# Altium PCB MC1_LCD.PcbDoc
Units mm, origin at the board's own origin, x right, y up, seen from the top; angles counter-clockwise.
Board outline 45.1 x 63.6 mm, 2 copper layers (Top Layer, Bottom Layer), stack 1.57 mm thick; 60 components, 42 nets, 236 pads, 184 vias.
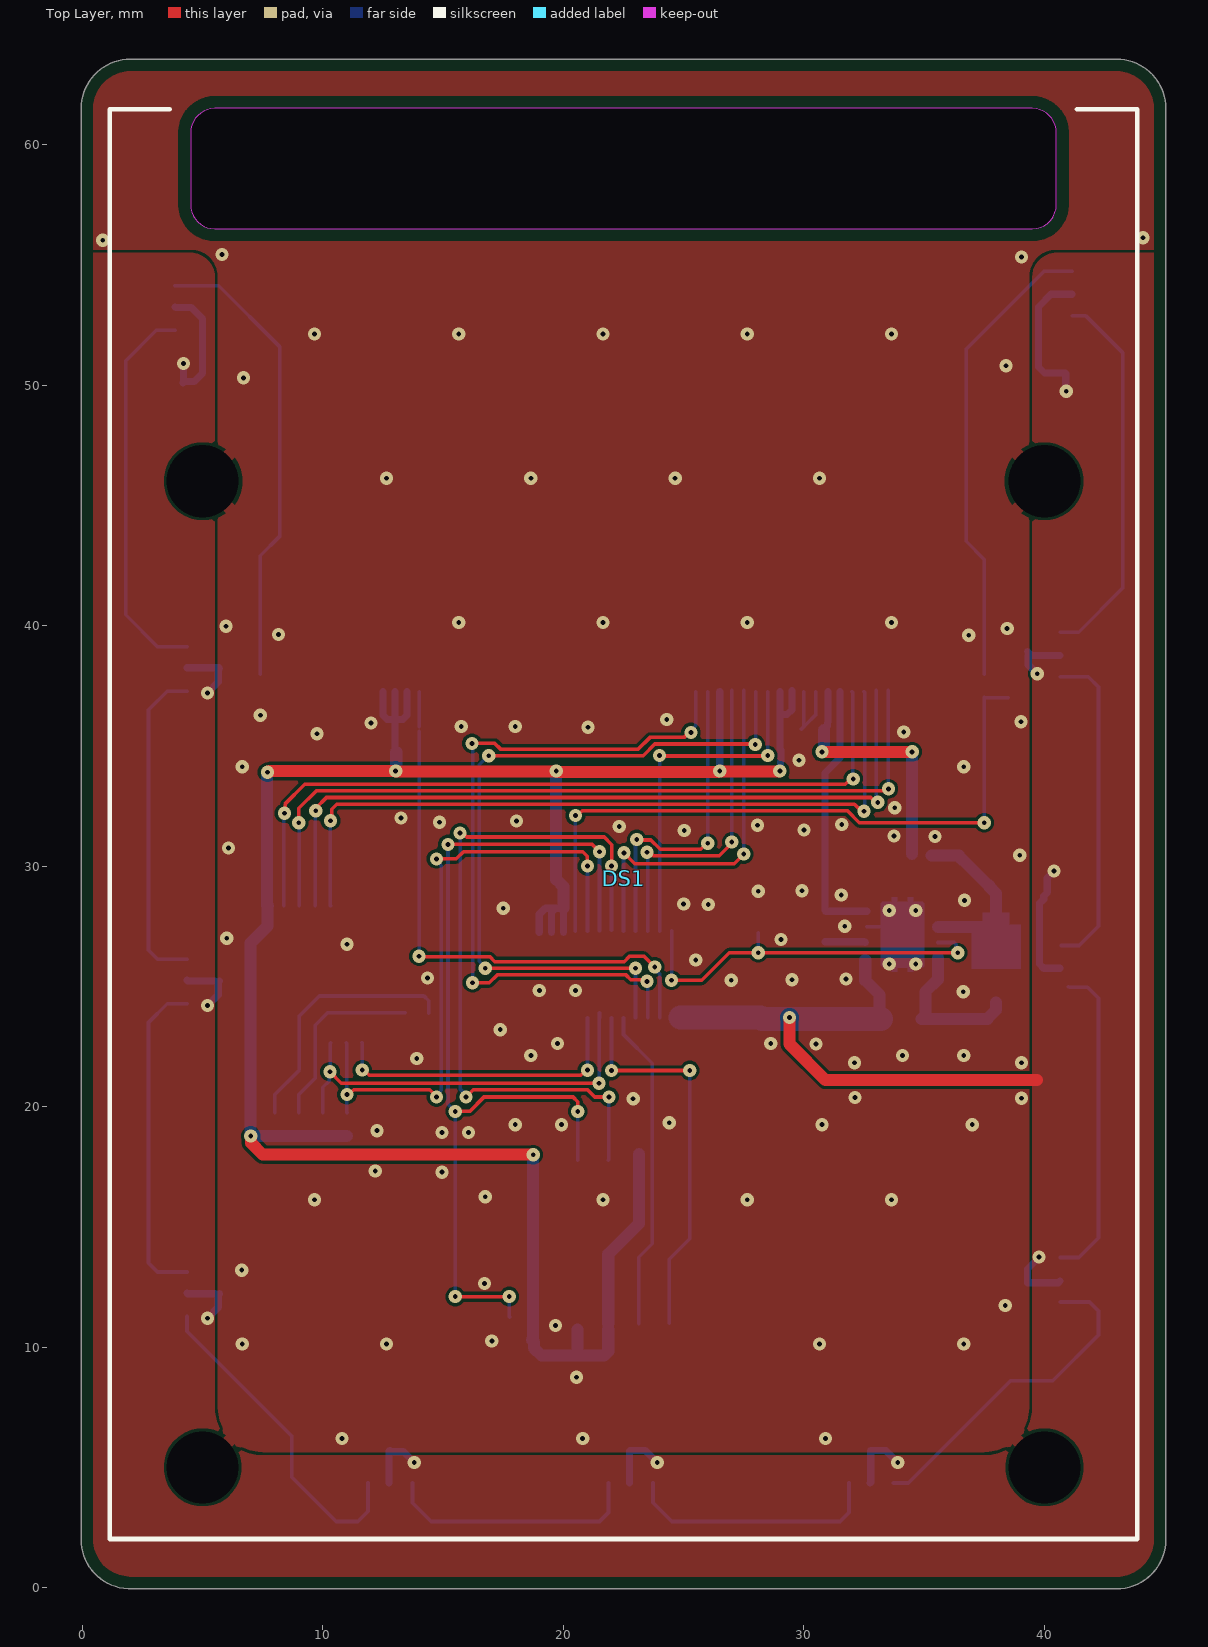
[diagram p0: Top Layer view]
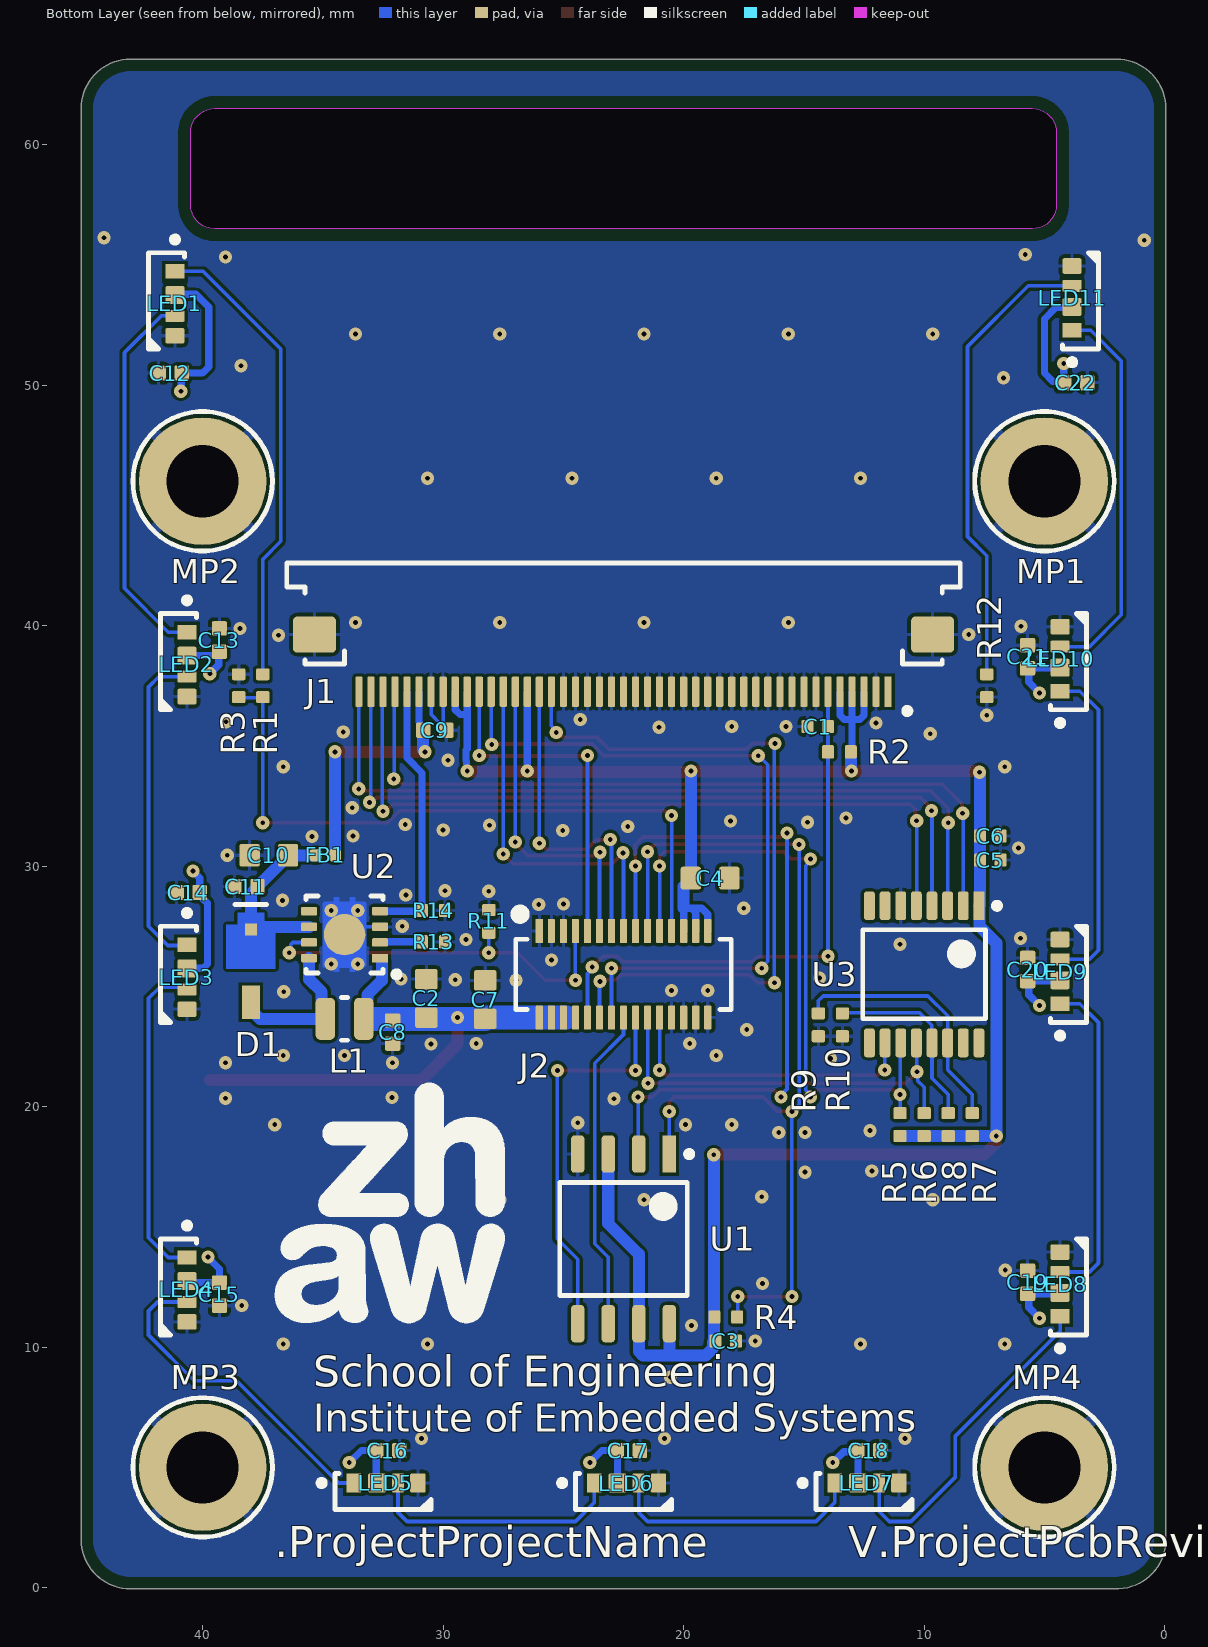
[diagram p1: Bottom Layer view, seen from below]
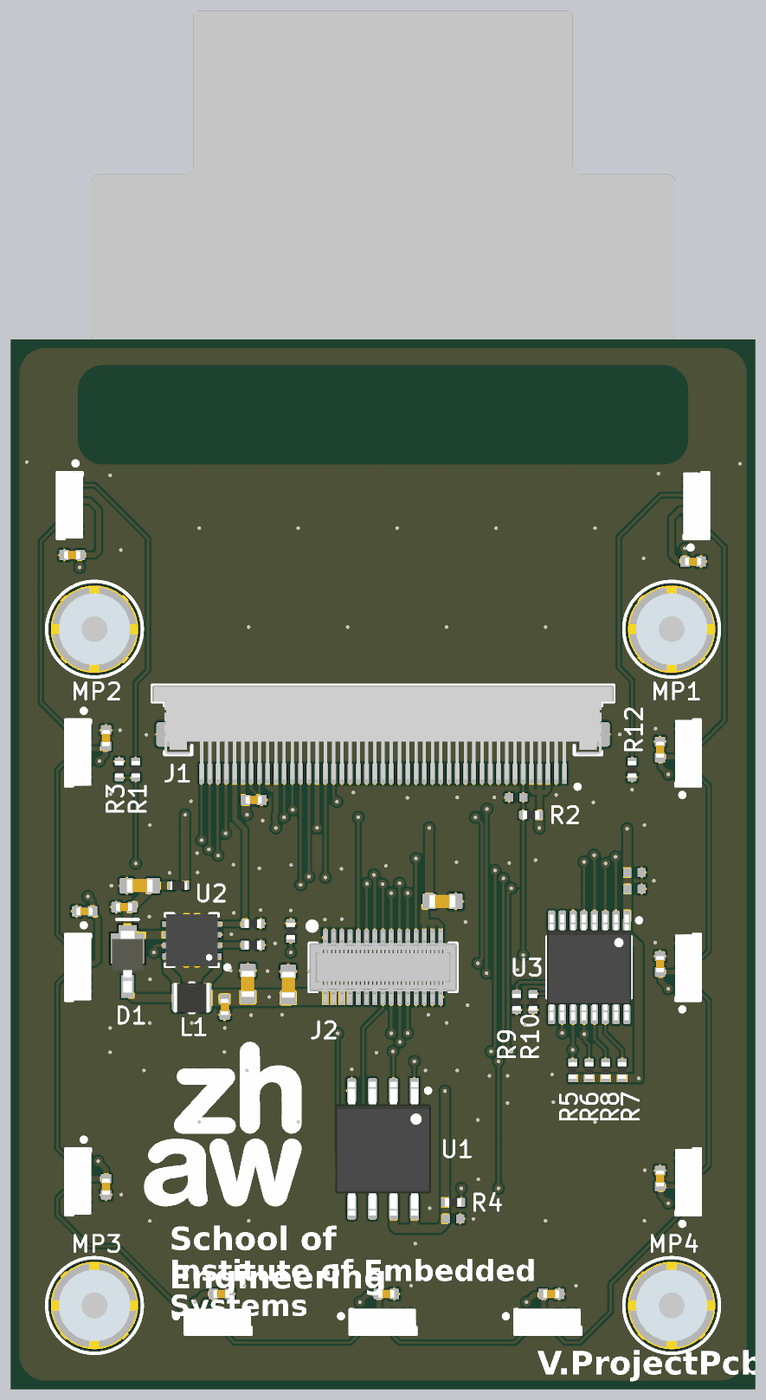
[diagram p2: 3D render of the assembled board from below, using the file's embedded part models]

## Layer stack, top to bottom
Top Solder: solder mask 0.01, Solder Resist, Dk 3.3
Top Layer: signal copper 0.035
Dielectric 3: core 1.5, IS400, Dk 4.52
Bottom Layer: signal copper 0.035
Bottom Solder: solder mask 0.01, Solder Resist, Dk 3.3

## Board outline
1.535,0.003 cw(c2,2) -0.05,2 -0.05,61.499 -0.05,61.5 cw(c2,61.5) 2,63.55 43,63.55 cw(c43,61.5) 45.05,61.5 45.05,61.499 45.05,2 45.05,1.999 cw(c43,2) 43.001,-0.05 42.999,-0.05 2.014,-0.048 1.91,-0.048
cut-out: 5.5,61.5 ccw(c5.5,60.5) 4.5,60.5 4.5,57.5 ccw(c5.5,57.5) 5.5,56.5 39.5,56.5 ccw(c39.5,57.5) 40.5,57.5 40.5,60.5 ccw(c39.5,60.5) 39.5,61.5

## Design rules (kind name [scope] priority, off if disabled: settings)
AssemblyTestPointUsage [All] p1: valid=2
BoardOutlineClearance [All] p1: gap=0.5 ignorepadtopadclearanceinfootprint=FALSE // Default copper to scoring edge clearance = 500 um. Can be set to 200 um for milling edges.
Clearance "Default Clearance" [All] p1: gap=0.125 ignorepadtopadclearanceinfootprint=TRUE // Default clearance. Choose between 150um and 100um depending on your design.
ComponentClearance "Standoffs to display clearance exception" [InComponentClass('Standoffs') vs InComponent('DS1')] p1: gap=0.09 collisioncheckmode=3 verticalgap=0.09 showdistances=FALSE
ComponentClearance "Default Component Clearance" [All] p2: gap=0.5 collisioncheckmode=3 verticalgap=0.5 showdistances=FALSE // Default component clearance for standard layouts. Can be reduced for high density layouts.
DiffPairsRouting [All] p1 off: maxlimit=0.254 minlimit=0.254 mostfreqgap=0.254 toplayer_minwidth=0.381 toplayer_maxwidth=0.381 toplayer_prefwidth=0.381 bottomlayer_minwidth=0.381 bottomlayer_maxwidth=0.381 bottomlayer_prefwidth=0.381 maxuncoupledlength=12.7
FabricationTestPointUsage [All] p1: valid=2 allowmultiple=FALSE
Height [All] p1 off: minheight=0 maxheight=25.4 prefheight=12.7
HoleSize "HoleSize NPTH" [(ObjectKind = 'Pad') And (PadIsPlated = 'False')] p1: absolutevalues=TRUE maxlimit=5 minlimit=0.2 maxpercent=80.000 minpercent=20.000 // Minimum hole size for non plated through holes (hole size = min drill size)
HoleSize "HoleSize PTH" [((ObjectKind = 'Pad') And (PadIsPlated = 'True')) or (ObjectKind = 'Via')] p2: absolutevalues=TRUE maxlimit=5 minlimit=0.2 maxpercent=80.000 minpercent=20.000 // Minimum hole size of plated through holes (drills size typ. = hole size + 100 um)
HoleToHoleClearance [All] p1: gap=0.35 allowstackedmicrovias=FALSE // Generic hole to hole clearance. Valid for PTH to PTH holes (drill hole to drill hole clearance = 0.25 mm, drill = hole + 100 um). Currently used for all holes, also NPTH.
MinimumAnnularRing "MinimumAnnularRing Via" [IsVia] p1: minimumring=0.15 // Default via MAR (hole to pad). Based on a MAR (drill to pad) of 125um + 50um drill (drill size = hole size + 100um).
MinimumAnnularRing [All] p2: minimumring=0.25 // Default MAR
MinimumSolderMaskSliver [All] p1: minsoldermaskwidth=0.1 // Default solder mask sliver. Can be reduced to 75um when producing at certain manufacturers.
PlaneClearance [All] p1: clearance=0.25
PlaneConnect [All] p1: pad.planeconnectstyle=Relief pad.reliefexpansion=0.5 pad.reliefentries=4 pad.reliefconductorwidth=0.15 pad.reliefairgap=0.15 via.planeconnectstyle=Direct via.reliefexpansion=0.508 via.reliefentries=4 via.reliefconductorwidth=0.254 via.reliefairgap=0.254
PolygonConnect "Standoff Pad Connection" [InPadClass('Mounting Holes')] p1: connectstyle=Relief reliefconductorwidth=0.5 reliefentries=4 polygonreliefangle="45 Angle" airgapwidth=0.15
PolygonConnect [All] p2: thpad.connectstyle=Relief thpad.reliefconductorwidth=0.15 thpad.reliefentries=4 thpad.polygonreliefangle="90 Angle" thpad.airgapwidth=0.15 smdpad.connectstyle=Relief smdpad.reliefconductorwidth=0.15 smdpad.reliefentries=4 smdpad.polygonreliefangle="90 Angle" smdpad.airgapwidth=0.15 via.connectstyle=Direct via.reliefconductorwidth=0.3 via.reliefentries=4 via.polygonreliefangle="90 Angle" via.airgapwidth=0.3
RoutingVias ScrewHoles [IsVia And HoleSize >= 3] p1: holewidth=2.9 width=5.3 viastyle="Through Hole" minholewidth=2.9 minwidth=5.3 maxholewidth=2.9 maxwidth=6.3
RoutingVias [All] p2: holewidth=0.25 width=0.55 viastyle="Through Hole" minholewidth=0.2 minwidth=0.55 maxholewidth=0.25 maxwidth=0.6 // Default via 600/250. Can be reduced to 550/200 if required. If smaller vias are required, make sure you know what you're doing.
SilkToSilkClearance [All] p1 off: silktosilkclearance=0.2
SilkToSolderMaskClearance [IsPad] p1: minsilkscreentomaskgap=0.15 clearancetoexposedcopper=FALSE
SolderMaskExpansion [All] p1: expansion=0.05 istentingtop=FALSE // Default solder mask expansion
SupplyNets "Schematic Supply Nets_1" [InNet('5V')] p1: voltage=0.000
SupplyNets "Schematic Supply Nets_2" [InNet('GND')] p2: voltage=0.000
SupplyNets "Schematic Supply Nets" [InNet('3V3')] p3: voltage=0.000
UnConnectedPin [Not InPadClass('Unconnected Pads')] p1:  // Default rule to detect unconnnected pads. Add intended unconnected pads to respective pad class.
UnRoutedNet [All] p1: checkbadconnections=TRUE
Width "Default Width" [All] p1: maxlimit=5 minlimit=0.15 preferedwidth=0.15 minimp=50.000000 maximp=50.000000 favimp=50.000000 // Default min. track width. Choose between 150um and 100um depending on your design.
17 further rules are at their usual default settings.

## Classes and differential pairs
component class Standoffs: MP1 MP2 MP3 MP4
pad class "Mounting Holes": MP1-1 MP2-1 MP3-1 MP4-1
pad class "Unconnected Pads": J1-1 U2-5 U3-7 U3-8 U3-9 U3-15 U3-16

## Components (designator, comment, footprint, x,y, rotation, side; value= is the part's Value field where it differs from the comment)
C1 "100nF/16V" CAPC1005X05L 14.425,35.8 r0 bottom value=100nF
C2 "4.7uF/16V" CAPC1608X80N 30.7,24.5 r90 bottom value=4.7µF
C3 "100nF/16V" CAPC1005X05L 18.25,10.25 r180 bottom value=100nF
C4 "4.7uF/16V" CAPC1608X80N 18.9,29.5 r180 bottom value=4.7µF
C5 "100nF/16V" CAPC1005X05L 7.25,30.25 r180 bottom value=100nF
C6 "1uF/10V" CAPC1005X05L 7.25,31.25 r180 bottom value=1µF
C7 "10uF/10V" CAPC1608X80N 28.25,24.45 r90 bottom value=10µF
C8 "100nF/16V" CAPC1005X50N 32.1,23.1 r270 bottom value=100nF
C9 "100nF/16V" CAPC1005X50N 30.35,35.65 r180 bottom value=100nF
C10 "4.7uF/16V" CAPC1608X80N 37.25,30.45 r0 bottom value=4.7µF
C11 "100nF/16V" CAPC1005X50N 38.2,29.15 r0 bottom value=100nF
C12 "100nF/16V" CAPC1005X50N 41.35,50.5 r0 bottom value=100nF
C13 "100nF/16V" CAPC1005X50N 39.3,39.4 r90 bottom value=100nF
C14 "100nF/16V" CAPC1005X50N 40.6,28.9 r0 bottom value=100nF
C15 "100nF/16V" CAPC1005X50N 39.3,12.2 r270 bottom value=100nF
C16 "100nF/16V" CAPC1005X50N 32.3,5.7 r180 bottom value=100nF
C17 "100nF/16V" CAPC1005X50N 22.3,5.7 r180 bottom value=100nF
C18 "100nF/16V" CAPC1005X50N 12.3,5.7 r180 bottom value=100nF
C19 "100nF/16V" CAPC1005X50N 5.7,12.7 r90 bottom value=100nF
C20 "100nF/16V" CAPC1005X50N 5.7,25.7 r90 bottom value=100nF
C21 "100nF/16V" CAPC1005X50N 5.7,38.7 r90 bottom value=100nF
C22 "100nF/16V" CAPC1005X50N 3.7,50.1 r180 bottom value=100nF
D1 "STPS1L40M" DIOM190190X100N 38,25.85 r270 bottom
DS1 "DT024CTFT-TS" LCD_DT024CTFT-TS 22.5,29.5 r180 top locked
FB1 "BLM15AX601SN1D" INDC1005X05L 34.9,30.45 r180 bottom
J1 "SEA8058-45" DISPLAYTECH_SEA8058-45 22.5,40.5 r90 bottom locked
J2 "53885-0308" MOLEX_53885-0308 22.5,25.5 r270 bottom locked
L1 "DFE201610E-4R7M=P2" INDC2016X10L 34.1,23.65 r0 bottom locked
LED1 "4691" LED_SK68XX-SIDE 41.5,53.5 r270 bottom locked
LED2 "4691" LED_SK68XX-SIDE 41,38.5 r270 bottom locked
LED3 "4691" LED_SK68XX-SIDE 41,25.5 r270 bottom locked
LED4 "4691" LED_SK68XX-SIDE 41,12.5 r270 bottom locked
LED5 "4691" LED_SK68XX-SIDE 32.5,4 r180 bottom locked
LED6 "4691" LED_SK68XX-SIDE 22.5,4 r180 bottom locked
LED7 "4691" LED_SK68XX-SIDE 12.5,4 r180 bottom locked
LED8 "4691" LED_SK68XX-SIDE 4,12.5 r90 bottom locked
LED9 "4691" LED_SK68XX-SIDE 4,25.5 r90 bottom locked
LED10 "4691" LED_SK68XX-SIDE 4,38.5 r90 bottom locked
LED11 "4691" LED_SK68XX-SIDE 3.5,53.5 r90 bottom locked
MP1 "9774025243R" WE_9774025243R 5,46 r180 bottom locked
MP2 "9774025243R" WE_9774025243R 40,46 r180 bottom locked
MP3 "9774025243R" WE_9774025243R 40,5 r180 bottom locked
MP4 "9774025243R" WE_9774025243R 5,5 r180 bottom locked
R1 "510R" RESC1005X35N 37.5,37.5 r90 bottom value=510
R2 "10kR" RESC1005X35N 13.525,34.75 r0 bottom value=10k
R3 "10kR" RESC1005X35N 38.5,37.5 r90 bottom value=10k
R4 "10kR" RESC1005X35N 18.25,11.25 r180 bottom value=10k
R5 "4.7kR" RESC1005X35N 11,19.25 r90 bottom value=4.7k
R6 "4.7kR" RESC1005X35N 10,19.25 r90 bottom value=4.7k
R7 "0R" RESC1005X35N 8,19.25 r90 bottom value=0
R8 "0R" RESC1005X35N 9,19.25 r90 bottom value=0
R9 "0R" RESC1005X35N 14.4,23.4 r270 bottom value=0
R10 "0R" RESC1005X35N 13.4,23.4 r270 bottom value=0
R11 "100kR" RESC1005X35N 28.1,27.7 r90 bottom value=100k
R12 "0R" RESC1005X35N 7.4,37.5 r270 bottom value=0
R13 "100kR" RESC1005X35N 30.4,26.85 r180 bottom value=100k
R14 "10R" RESC1005X35N 30.4,28.15 r180 bottom value=10
U1 "MX25L6433FM2I-08G" SOP127P800X210-8L 22.5,14.5 r0 bottom
U2 "STLD40DPUR" QFN65P300X300X100-9T274X190N 34.1,27.15 r90 bottom locked
U3 "TSC2007IPWRQ1" TSOP65P640X120-16L 10,25.5 r0 bottom locked

## Footprints (in the part's own frame and the unit in brackets; to place one, negate y for a bottom-side part, rotate by r counter-clockwise, add the part's x,y. Pads: shape width x height; smd on the part's side, far side on the other; paste and mask are expansions set on the pad)
CAPC1005X05L [mm] "Chip Capacitor, 2-Leads, Body 1.00x0.50mm, IPC High Density"
  rrect25% 0.5x0.54 smd mask+0.05: 1(-0.43,0) 2(0.43,0)
  body extent -0.5,-0.25 0.5,0.25, height 0.5
CAPC1005X50N [mm] "Chip Capacitor 0402, 2-Leads, Body 1.00x0.50mm, IPC Medium Density"
  rrect23% 0.6x0.64 smd: 1(-0.48,0) 2(0.48,0)
  body extent -0.5,-0.25 0.5,0.25, height 0.5
CAPC1608X80N [mm] "Chip Capacitor 0603, 2-Leads, Body 1.60x0.80mm, IPC Medium Density"
  rrect23% 0.85x0.95 smd: 1(-0.8,0) 2(0.8,0)
  body extent -0.8,-0.4 0.8,0.4, height 0.8
DIOM190190X100N [mm] "DO-216AA, 2-Leads, Body 1.9x1.9mm, IPC Medium Density"
  rect 0.5x0.5 smd paste-1 mask+0: 1(-1.515,0.006)
  rect 1.38x0.75 smd: 2(1.515,0.006)
  Top Layer region: 0.115,-1.009 -1.705,-1.009 -1.705,-0.544 -2.205,-0.544 -2.205,0.556 -1.705,0.556 -1.705,1.021 0.115,1.021
  silkscreen extent -2.55,-0.65 -2.55,0.65, body extent -1.88,-0.94 1.87,0.96, height 1.15
DISPLAYTECH_SEA8058-45 [mm] "FPC Connector, 45 Pin, Horizontal, Pitch 500um, SMD, Body L26.5B4.2H2"
  rect 1.25x0.3 smd mask+0.05: 1(-3.25,-11)
  rrect25% 1.25x0.3 smd mask+0.05: 2(-3.25,-10.5) 3(-3.25,-10) 4(-3.25,-9.5) 5(-3.25,-9) 6(-3.25,-8.5) 7(-3.25,-8) 8(-3.25,-7.5) 9(-3.25,-7) 10(-3.25,-6.5) 11(-3.25,-6) 12(-3.25,-5.5) 13(-3.25,-5) 14(-3.25,-4.5) 15(-3.25,-4) 16(-3.25,-3.5) 17(-3.25,-3) 18(-3.25,-2.5) 19(-3.25,-2) 20(-3.25,-1.5) 21(-3.25,-1) 22(-3.25,-0.5) 23(-3.25,0) 24(-3.25,0.5) 25(-3.25,1) 26(-3.25,1.5) 27(-3.25,2) 28(-3.25,2.5) 29(-3.25,3) 30(-3.25,3.5) 31(-3.25,4) 32(-3.25,4.5) 33(-3.25,5) 34(-3.25,5.5) 35(-3.25,6) 36(-3.25,6.5) 37(-3.25,7) 38(-3.25,7.5) 39(-3.25,8) 40(-3.25,8.5) 41(-3.25,9) 42(-3.25,9.5) 43(-3.25,10) 44(-3.25,10.5) 45(-3.25,11)
  rrect25% 1.5x1.8 smd: MP(-0.875,-12.85) MP(-0.875,12.85)
  silkscreen extent -4.17,-14 2.1,14, body extent -3.6,-14 2.1,14, height 2
INDC1005X05L [mm] "Chip Inductor, 2-Leads, Body 1.05x0.55mm, IPC High Density"
  rrect50% 0.49x0.52 smd mask+0.05: 1(-0.405,0) 2(0.405,0)
  body extent -0.53,-0.28 0.53,0.28, height 0.55
INDC2016X10L [mm] "Chip Inductor, 2-Leads, Body 2.00x1.60mm, IPC High Density"
  rrect50% 0.8x1.75 smd: 1(-0.8,0) 2(0.8,0)
  silkscreen extent -0.13,-0.89 0.13,0.89, body extent -1.1,-0.9 1.1,0.9, height 1
LCD_DT024CTFT-TS [mm] "Display, FPC connection, 240X320px, Touch: yes, Backlight: yes"
  silkscreen extent -21.36,-31.97 21.36,27.48, body extent -21.36,-53.98 21.36,27.48, height 3.8
LED_SK68XX-SIDE [mm] "LED, SMD-4, 4-Leads, Body 4x2mm, RGB"
  rect 0.6x0.8 smd: 1(-1.225,0.35)
  rrect23% 0.75x0.8 smd: 2(-0.25,0.35)
  rrect24% 0.5x0.8 smd: 3(0.625,0.35)
  rrect24% 0.65x0.8 smd: 4(1.45,0.35)
  silkscreen extent -2.67,-0.75 2,0.75, body extent -2,-0.8 2,0.8, height 2
MOLEX_53885-0308 [mm] "SlimStack Board-to-Board Connector, Plug, 30-Leads, 2x15,  Body 8.95x2.92x1.48mm, Pitch 0.5mm"
  rect 1x0.3 smd mask+0.05: 1(-1.8,-3.5)
  rrect26% 1x0.3 smd mask+0.05: 2(1.8,-3.5) 3(-1.8,-3) 4(1.8,-3) 5(-1.8,-2.5) 6(1.8,-2.5) 7(-1.8,-2) 8(1.8,-2) 9(-1.8,-1.5) 10(1.8,-1.5) 11(-1.8,-1) 12(1.8,-1) 13(-1.8,-0.5) 14(1.8,-0.5) 15(-1.8,0) 16(1.8,0) 17(-1.8,0.5) 18(1.8,0.5) 19(-1.8,1) 20(1.8,1) 21(-1.8,1.5) 22(1.8,1.5) 23(-1.8,2) 24(1.8,2) 25(-1.8,2.5) 26(1.8,2.5) 27(-1.8,3) 28(1.8,3) 29(-1.8,3.5) 30(1.8,3.5)
  silkscreen extent -2.65,-4.48 1.46,4.48, body extent -2.1,-4.47 2.1,4.48, height 1.59
QFN65P300X300X100-9T274X190N [mm] "QFN-8+1, 8-Leads, Body 3.00x3.00mm, Pitch 0.65mm, Thermal Pad 2.74x1.9mm, IPC Medium Density"
  rect 0.35x0.65 smd: 1(-0.975,-1.475)
  rrect22% 0.35x0.65 smd: 2(-0.325,-1.475) 3(0.325,-1.475) 4(0.975,-1.475) 5(0.975,1.475) 6(0.325,1.475) 7(-0.325,1.475) 8(-0.975,1.475)
  round 1.727 smd: 9(0,0)
  Top Layer region: 1.37,-0.805 1.37,-0.44 1.55,-0.44 1.55,-0.21 1.37,-0.21 1.37,0.21 1.55,0.21 1.55,0.44 1.37,0.44 1.37,0.805 1.363,0.841 1.342,0.872 1.311,0.893 1.275,0.9 1.275,0.9 -1.275,0.9 -1.311,0.893 -1.342,0.872 -1.363,0.841 -1.37,0.805 -1.37,0.805 -1.37,0.44 -1.55,0.44 -1.55,0.21 -1.37,0.21 -1.37,-0.21 -1.55,-0.21 -1.55,-0.44 -1.37,-0.44 -1.37,-0.8 -1.27,-0.9 1.275,-0.9 1.311,-0.893 1.342,-0.872 1.363,-0.841 1.37,-0.805
  silkscreen extent -1.78,-2.28 1.6,1.6, body extent -1.58,-1.58 1.58,1.58, height 1
RESC1005X35N [mm] "Chip Resistor 0402, 2-Leads, Body 1.00x0.50mm, IPC Medium Density"
  rrect24% 0.5x0.55 smd: 1(-0.475,0) 2(0.475,0)
  body extent -0.5,-0.25 0.5,0.25, height 0.35
SOP127P800X210-8L [mm] "SOP-8, 8-Leads, Body 5.24x5.30mm, Pitch 1.27mm, IPC High Density"
  rect 0.55x1.55 smd: 1(-1.905,-3.525)
  rrect50% 0.55x1.55 smd: 2(-0.635,-3.525) 3(0.635,-3.525) 4(1.905,-3.525) 5(1.905,3.525) 6(0.635,3.525) 7(-0.635,3.525) 8(-1.905,3.525)
  silkscreen extent -2.85,-3.65 2.65,2.35, body extent -2.9,-4.05 2.9,4.05, height 1.73
TSOP65P640X120-16L [mm] "TSOP-16, 16-Leads, Body 5.00x5.00mm, Pitch 0.65mm, IPC High Density"
  rect 0.45x1.2 smd mask+0.05: 1(-2.275,-2.85)
  rrect50% 0.45x1.2 smd mask+0.05: 2(-1.625,-2.85) 3(-0.975,-2.85) 4(-0.325,-2.85) 5(0.325,-2.85) 6(0.975,-2.85) 7(1.625,-2.85) 8(2.275,-2.85) 9(2.275,2.85) 10(1.625,2.85) 11(0.975,2.85) 12(0.325,2.85) 13(-0.325,2.85) 14(-0.975,2.85) 15(-1.625,2.85) 16(-2.275,2.85)
  silkscreen extent -3.15,-2.97 2.55,1.85, body extent -2.55,-3.2 2.55,3.2, height 1.2
WE_9774025243R [mm] "Threaded standoff with pad. Standoff height 2.5 mm."
  round 5.3 / inner round 0 / far side round 0 hole 3 unplated paste-2539.97: 1(0,0)
  silkscreen extent -2.9,-2.9 2.9,2.9, body extent -2.17,-2.16 2.17,2.16, height 2.5

## Part data
C1 C3 C5 C8 C9 C11 C12 C13 C14 C15 C16 C17 C18 C19 C20 C21 C22: library part CMP-001-00001-22, "Cap MLCC, 100nF, 16V, X7R, 5%,  0402", Case Code (Metric)=1005, Case/Package=0402, Dielectricum=X7R, Tolerance=5%, Voltage Rating=16V, Mounting Technology=SMD, Type=MLCC
C2 C4 C10: library part CMP-00443-4, "Cap MLCC, 4.7uF, 16V, X7R, 10%, 0603", Case Code (Metric)=1608, Case/Package=0603, Dielectricum=X7R, Tolerance=10%, Voltage Rating=16V, Mounting Technology=SMD, Type=MLCC
C6: library part CMP-00269-6, "CAP MLCC, 1uF, 10V, X7R, 10%, 0402", Case Code (Metric)=1005, Case/Package=0402, Dielectricum=X7R, Tolerance=10%, Voltage Rating=10V, Mounting Technology=SMD, Type=MLCC
C7: library part CMP-001-00075-19, "Cap MLCC, 10uF, 10V, X5R, 10%, 0603", Case Code (Metric)=1608, Case/Package=0603, Dielectricum=X5R, Tolerance=10%, Voltage Rating=10V, Mounting Technology=SMD, Type=MLCC
D1: library part CMP-00907-3, "Schottky Diode, 40V, 1A, DO-216AA", Case/Package=DO-216AA, Current=1A, Voltage=40V, Mounting Technology=SMD, Size=L1.9B1.9H1, Type=Schottky
DS1: library part CMP-00784-22, "Display, 2.5V..3.3V, 240x320px, Parallel/SPI, Touch: yes, Backlight: yes, FPC-45", Case/Package=FPC-45, Max Supply Voltage=3.3V, Min Supply Voltage=2.5V, Backlight=yes, Interface=Parallel/SPI, Mounting Technology=SMD, Resolution=240x320, Size=L59.46B42.72H3.8, Touch=yes
FB1: library part CMP-006-00058-7, "Ferrite Bead, 340mR @ DC, 600R @ 100MHz, 25%, 0402, 500mA", Case Code (Metric)=1005, Case/Package=0402, Current=500mA, Tolerance=25%, Impedance="600R @ 100 MHz", Impedance DC=0.34, Mounting Technology=SMD
J1: library part CMP-00783-14, "FFC/FPC, 45 Pin, Pitch 500um, 500mA, Horizontal, SMD, L28B4.2H2", Manufacturer="Displaytech - a SEACOMP company", Max Current=500mA, Angle=Horizontal, Connection=Pluggable, Gender=Female, Mounting Technology=SMD, Pin Mapping=1x45, Pins=45, Pitch=500µm, Size=L28B4.2H2, Type=FFC/FPC
J2: library part CMP-00906-6, "Board to Board, SlimStack, 2x15 Pin, Pitch 0.5mm, Male, 0.5A, 50V, Vertical, SMD, L8.95B2.9H1.48", Manufacturer=Molex, Max Current=500mA, Max Voltage=50V, Angle=Vertical, Connection=Pluggable, Family Name=SlimStack, Gender=Male, Mating Part=54102, Mounting Technology=SMD, Pin Mapping=2x15, Pins=30, Pitch=500µm, Size=L8.95B2.92H1.48, Type="Board to Board"
L1: library part CMP-006-00095-2, "Coil, 4.7uH, 1.6A, 288mR, ±20%, 2016", Case Code (Metric)=2016, Case/Package=0806, Current=1.1A, Inductivity=4.7µH, Resistance DC=0.288, Tolerance=20%, Mounting Technology=SMD, Size=B2L1.6H1
LED1 LED2 LED3 LED4 LED5 LED6 LED7 LED8 LED9 LED10 LED11: library part CMP-00911-8, "LED, RGB, 12mA, 5V, 4020, L4B1.5H2, MPN: SK6812-SIDE, Manufacturer: Normand LED, Adafruit Product ID: 4691, NeoPixel", Case/Package=4020, Color=RGB, Forward Voltage=5V, Rated Current=12mA, Mounting Technology=SMD, Size=L4B1.5H2
MP1 MP2 MP3 MP4: library part CMP-00030-00036-1, "Standoff M2, SMD, D4.35H2.5, Würth Elektronik WA-SMSI SMT Stell Spacer with internal Thread, Standoff 2.5mm", Case/Package=SMD-1, Mounting Technology=SMD, Size=D4.35H2.5, Type=Standoff
R1: library part CMP-009-00498-5, "Res, 510R, 1%, 63mW, 0402", Case Code (Metric)=1005, Case/Package=0402, Power=63mW, Tolerance=1%, Voltage Rating=50V, Mounting Technology=SMD, Type=Fixed
R2 R3 R4: library part CMP-009-00298-12, "Res, 10kR, 1%, 0.063W, 0402", Case Code (Metric)=1005, Case/Package=0402, Power=63mW, Tolerance=1%, Voltage Rating=50V, Mounting Technology=SMD, Type=Fixed
R5 R6: library part CMP-009-00030-36, "Res, 4.7kR, 1%, 0.1W, 0402", Case Code (Metric)=1005, Case/Package=0402, Power=100mW, Tolerance=1%, Voltage Rating=50V, Mounting Technology=SMD, Type=Fixed
R7 R8 R9 R10 R12: library part CMP-009-00148-34, "Res, 0R, 1%, 0.063W, 0402", Case Code (Metric)=1005, Case/Package=0402, Power=63mW, Tolerance=1%, Voltage Rating=50V, Mounting Technology=SMD, Type=Fixed
R11 R13: library part CMP-009-00352-7, "Res, 100kR, 1%, 0.063W, 0402", Case Code (Metric)=1005, Case/Package=0402, Power=63mW, Tolerance=1%, Voltage Rating=50V, Mounting Technology=SMD, Type=Fixed
R14: library part CMP-009-00152-33, "Res, 10R, 1%, 0.063W, 0402", Case Code (Metric)=1005, Case/Package=0402, Power=63mW, Tolerance=1%, Voltage Rating=50V, Mounting Technology=SMD, Type=Fixed
U1: library part CMP-00779-6, "Flash, 64MBit, SPI, 2.65V..3.6V, SOP-8, NOR-Flash", Case/Package=SOP, Max Supply Voltage=3.6V, Min Supply Voltage=2.65V, Interface=SPI, Memory Size=64MBit, Mounting Technology=SMD, Size=L5.23B5.28H1.95, Technology=NOR-Flash
U2: library part CMP-00901-5, "LED Driver, 1 Ch, 3..5.5V, Power 3..37V, 1.1Ap, QFN-8", Case/Package=QFN-8, Max Logic Voltage=5.5V, Max Power Voltage=37V, Min Logic Voltage=3V, Peak Current=1.1A, Channels=1, Function="LED Driver", Min Power Voltage=3V, Mounting Technology=SMD, Size=L35B35H0.9
U3: library part CMP-00797-5, "Interface, Touchscreen-Controller, 20 kHz (8-Bit) or 10 kHz (12-Bit), 1.2V..3.6V, TSSOP-16, I2C", Case/Package=TSSOP-16, Max Supply Voltage=3.6V, Min Supply Voltage=1.2V, Interface Type=Touchscreen-Controller, Mounting Technology=SMD, Size=L5B4.4H1.2, Specification="20 kHz (8-Bit) or 10 kHz (12-Bit)"

## Via types
v1: diameter 0.55, hole 0.2, Top Layer to Bottom Layer, tented both sides, 184 vias

## Nets (pads, with @x,y where several pads share a name; then routed paths per layer and width w, separated by ;. In a path a pad name is that pad's centre, name@x,y a point inside that pad or via, vN(x,y) a via of type N, cw(c..) or ccw(c..) an arc to the next point about the centre after c; other vN are vias at no path point)
3V3: C3.1 C4.1 C5.1 C6.1 J1.3 J1.4 J1.5 J1.31 J1.36 J1.37 J2.25 J2.27 J2.29 R2.1 R4.1 R5.1 R6.1 R7.1 R8.1 U1.3 U1.7 U1.8 U3.1 | length 98.1
  Top Layer w0.5: v1(7,18.775) 7.01,18.765 7.01,18.49 7.5,18 v1(18.75,18) ; v1(7.7,33.9) 7.714,33.9 7.764,33.95 v1@13.002,33.95 ; v1@13.048,33.94 v1@19.677,33.94 ; v1@19.713,33.912 26.462,33.912 v1(26.5,33.95) ; v1@26.525,33.925 28.975,33.925 v1(29,33.95)
  Bottom Layer w0.3: J1.3 12.5,36.276 12.676,36.1 13,36.1 ; J1.4 13,36.1 ; v1(13.025,33.95) v1@13.05,33.975 ; R2.1 13,34.8 13,36.1 ; J1.5 13.5,36.276 13.324,36.1 13,36.1 ; J2.29@19,27.25 J2.29 19,28 19.25,28.25 19.676,28.25 ; J2.27@19.5,27.25 19.5,28.074 19.676,28.25 ; 19.975,29.024 20,28.999 ; J2.25@20,27.25 J2.25 20,28.25 19.676,28.25 ; v1(26.5,33.95) J1.31 ; v1(29,33.95) 29.027,33.977 29.027,34.349 29.05,34.372 29.05,34.828 29,34.878 29,36.3 ; J1.36 29,36.3 ; J1.37@29.5,37.3 29.5,36.5 29.3,36.3 29,36.3
  Bottom Layer w0.5: v1@7,18.75 v1@7.013,18.763 ; v1(7,18.775) 7,26.8 7.707,27.507 7.707,28.332 U3.1 ; v1@7.013,18.775 R7.1@7.987,18.775 ; U3.1@7.686,28.356 7.686,33.886 v1(7.7,33.9) ; R7.1 R8.1 R6.1 R5.1 ; v1@13.05,33.975 R2.1 ; C3.1@18.697,10.297 C3.1@18.7,10.3 ; v1(18.75,18) 18.738,17.988 18.738,10.338 C3.1@18.7,10.3 ; v1(19.7,33.95) C4.1 19.7,29.45 20,29.15 20,28.999 20,28.25 ; U1.8@20.595,10.725 20.595,9.645 ; U1.7@21.865,10.725 21.865,9.821 21.689,9.645 20.595,9.645 ; U1.7 21.865,13.865 23.135,15.135 U1.3 ; C3.1@18.7,10.3 18.78,10.22 18.78,9.959 19.094,9.645 20.595,9.645
5V: C2.1 C7.1 C8.1 C12.1 C13.1 C14.1 C15.1 C16.1 C17.1 C18.1 C19.1 C20.1 C21.1 C22.1 J2.2 J2.4 J2.6 J2.8 L1.1 LED1.2 LED2.2 LED3.2 LED4.2 LED5.2 LED6.2 LED7.2 LED8.2 LED9.2 LED10.2 LED11.2 U2.1 | length 59.9
  Top Layer w0.5: v1(29.4,23.7) 29.4,22.6 30.9,21.1 39.7,21.1
  Bottom Layer w0.3: LED11.2 3.874,53.226 4.524,53.226 5,52.75 5,50.5 4.651,50.151 4.231,50.151 C22.1@4.2,50.12 ; C22.1 C22.1@4.2,50.12 ; v1(4.2,50.9) C22.1@4.2,50.12 ; LED8.2 4.38,12.22 C19.1@5.5,12.22 ; LED9.2 4.38,25.22 C20.1@5.5,25.22 ; LED10.2 5.67,38.25 C21.1 5.652,38.172 5.652,37.652 v1(5.2,37.2) ; v1(5.2,11.2) 5.652,11.652 5.652,12.172 C19.1 ; v1(5.2,24.2) 5.652,24.652 5.652,25.172 C20.1 ; LED7.2 12.75,5.67 C18.1 12.828,5.652 13.348,5.652 v1(13.8,5.2) ; LED6.2 22.75,5.67 C17.1 23.399,5.7 v1@23.899,5.2 ; LED5.2 32.78,4.38 C16.1 33.399,5.7 v1@33.899,5.2 ; C13.1 39.47,38.75 LED2.2 ; C13.1@39.33,38.75 39.33,38.37 v1(39.7,38) ; v1(39.777,13.747) 39.777,13.724 39.301,13.248 39.301,12.681 C15.1 40.58,12.68 LED4.2 ; v1@40.4,29.9 40.4,29.789 40.12,29.509 C14.1 39.97,28.75 39.97,28.624 39.8,28.454 39.8,25.926 39.976,25.75 LED3.2 ; v1(40.905,49.746) 40.888,49.763 40.888,50.482 C12.1 40,50.5 39.75,50.75 39.75,53.25 40.276,53.776 LED1.2@41.143,53.776
  Bottom Layer w0.5: U2.1@32.55,26.1 32.55,25.25 33.15,24.65 33.15,23.8 L1.1
  Bottom Layer w1: J2.6@24.864,23.7 J2.6 J2.4 J2.2 C7.1@28.2,23.7 ; C7.1 C2.1@30.55,23.65 ; C2.1@30.65,23.65 L1.1@33.2,23.65
  other v1: 23.9,5.2 33.9,5.2 40.4,29.8
DISP_BL: J2.7 R11.1 U2.7 | length 16.4
  Top Layer w0.15: v1(24.5,25.25) 25.75,25.25 26.9,26.4 v1(28.1,26.4) v1(36.4,26.4)
  Bottom Layer w0.15: v1(24.5,25.25) J2.7 ; R11.1@28.097,27.224 28.1,27.221 v1(28.1,26.4) ; U2.7 36.242,26.825 36.33,26.737 36.33,26.47 v1(36.4,26.4)
DISP_NRST: C1.1 J1.6 J2.10 R2.2 | length 23.2
  Top Layer w0.15: v1(14,26.25) 14.025,26.225 16.947,26.225 17.147,26.025 22.525,26.025 22.75,26.25 23.35,26.25 v1(23.8,25.8)
  Bottom Layer w0.15: v1(14,26.25) R2.2 C1.1@14,35.6 ; C1.1@14,35.805 J1.6 ; v1(23.8,25.8) 23.8,25.712 24,25.512 J2.10
DISP_TE: J1.35 J2.9 | length 14.5
  Top Layer w0.15: v1(24,34.6) 24.023,34.577 28.477,34.577 v1(28.5,34.6)
  Bottom Layer w0.15: J2.9 v1(24,34.6) ; v1(28.5,34.6) J1.35
GND: C1.2 C2.2 C3.2 C4.2 C5.2 C6.2 C7.2 C8.2 C9.2 C10.2 C11.2 C12.2 C13.2 C14.2 C15.2 C16.2 C17.2 C18.2 C19.2 C20.2 C21.2 C22.2 J1.2 J1.7 J1.8 J1.9 J1.10 J1.11 J1.12 J1.13 J1.14 J1.15 J1.16 J1.17 J1.18 J1.19 J1.20 J1.21 J1.22 J1.23 J1.24 J1.25 J1.26 J1.27 J1.28 J1.38 J1.39 J1.MP J2.1 J2.3 J2.5 J2.24 J2.26 J2.28 J2.30 LED1.4 LED2.4 LED3.4 LED4.4 LED5.4 LED6.4 LED7.4 LED8.4 LED9.4 LED10.4 LED11.4 MP1.1 MP2.1 MP3.1 MP4.1 R3.2 R9.2 R10.2 R11.2 R12.2 R13.2 R14.2 U1.4 U2.3 U2.9 U3.6 | length 4.9
  Bottom Layer w0.15: J1.38 30,35.8 29.9,35.7 30.095,35.895 30.5,36.3 J1.39 ; U2.3 33.348,27.475 33.371,27.452 34.052,27.452 U2.9@34.1,27.5
  other v1: 10.8,6.2 20.8,6.2 30.9,6.2 20.55,8.75 6.646,10.128 12.646,10.128 30.646,10.128 36.646,10.128 17.025,10.25 19.675,10.9 38.375,11.725 16.725,12.65 6.625,13.2 9.646,16.128 21.646,16.128 27.646,16.128 33.646,16.128 16.75,16.25 14.95,17.275 12.175,17.325 14.95,18.925 16.05,18.925 12.25,19 18,19.25 19.925,19.25 30.75,19.25 37,19.25 24.4,19.325 22.9,20.325 39.05,20.35 32.125,20.375 32.1,21.825 39.05,21.825 13.9,22 18.646,22.128 34.1,22.125 36.646,22.128 30.5,22.6 19.75,22.625 28.625,22.625 17.375,23.2 36.625,24.775 19,24.825 20.5,24.825 26.975,25.25 29.5,25.275 31.75,25.3 14.35,25.35 33.55,25.925 34.65,25.925 25.5,26.1 11,26.75 29.05,26.95 6,27 31.7,27.5 33.55,28.15 34.65,28.15 17.5,28.25 26.025,28.4 25,28.425 36.675,28.575 31.55,28.8 28.1,28.95 29.925,28.975 38.975,30.45 6.075,30.75 35.45,31.225 33.75,31.25 25.025,31.475 30,31.5 22.325,31.65 28.075,31.7 31.575,31.725 14.85,31.825 18.05,31.875 13.25,32 33.779,32.426 6.646,34.128 36.646,34.128 29.8,34.4 9.75,35.5 34.15,35.575 21.025,35.775 15.75,35.8 18,35.8 12,35.95 39.025,36 24.3,36.1 7.4,36.275 36.85,39.6 8.15,39.625 38.45,39.875 5.975,39.975 15.646,40.128 21.646,40.128 27.646,40.128 33.646,40.128 12.646,46.128 18.646,46.128 24.646,46.128 30.646,46.128 6.7,50.3 38.4,50.8 9.646,52.128 15.646,52.128 21.646,52.128 27.646,52.128 33.646,52.128 39.05,55.325 5.8,55.425 0.85,56.025 44.1,56.125
INT: J2.22 U3.10 | length 12.9
  Top Layer w0.15: v1(11.637,21.518) 11.707,21.518 11.925,21.3 20.715,21.3 20.931,21.516 v1(21.003,21.516)
  Bottom Layer w0.15: U3.10 11.631,22.644 11.631,21.524 v1(11.637,21.518) ; v1@21,21.519 J2.22
LED_A: C9.1 FB1.2 J1.40 | length 10.7
  Top Layer w0.5: v1(30.75,34.75) v1(34.5,34.75)
  Bottom Layer w0.3: C9.1@30.75,35.69 30.85,35.69 30.98,35.82 30.98,35.976 31,35.996 J1.40
  Bottom Layer w0.5: v1(30.75,34.75) 30.75,34.764 30.83,34.844 C9.1 ; FB1.2@34.5,30.5 v1(34.5,34.75)
LED_DATA: J2.23 R1.1 R3.1 | length 28.3
  Top Layer w0.15: v1(20.5,32.1) 20.588,32.1 20.788,32.3 31.811,32.3 32.306,31.805 v1@37.5,31.805
  Bottom Layer w0.15: J2.23 20.5,30.386 v1(20.5,32.1) ; v1(37.5,31.8) R1.1 37.525,37 R3.1@38.5,37
LED_K: J1.41 R14.1 U2.4 | length 11.1
  Bottom Layer w0.3: J1.41 31.5,34.5 30.875,33.875 R14.1 30.9,28.125 U2.4
NetC10_1: C10.1 C11.1 D1.1 FB1.1 U2.6 | length 7.3
  Bottom Layer w0.5: FB1.1 C10.1@36.4,30.45 ; U2.6 37.875,27.475 D1.1@38,27.35 ; C10.1@36.45,30.42 C10.1@36.45,30.4 ; C10.1 C10.1@36.45,30.4 ; C11.1@37.72,29.13 37.994,28.856 D1.1 ; C11.1 37.72,29.17 37.67,29.22 37.65,29.22 36.645,30.225 36.625,30.225 C10.1@36.45,30.4
NetD1_2: D1.2 L1.2 U2.8 | length 6.4
  Bottom Layer w0.5: U2.8 35.575,25.294 35.05,24.769 35.05,23.8 L1.2 37.624,23.65 37.994,24.02 D1.2
NetLED1_1: LED1.1 R1.2 | length 19.6
  Bottom Layer w0.15: R1.2 37.5,42.75 36.75,43.5 36.75,51.5 39.975,54.725 LED1.1
NetLED1_3: LED1.3 LED2.1 | length 15.9
  Bottom Layer w0.15: LED2.1 41.425,39.725 43.25,41.55 43.25,51.35 41.725,52.875 LED1.3
NetLED2_3: LED2.3 LED3.1 | length 13.6
  Bottom Layer w0.15: LED2.3 41.825,37.875 42.25,37.45 42.25,27.5 41.45,26.7 LED3.1@40.7,26.7
NetLED3_3: LED3.3 LED4.1 | length 13.3
  Bottom Layer w0.15: LED4.1 41.425,13.725 42.25,14.55 42.25,24.5 41.787,24.963 41.025,24.963 LED3.3@41,24.987
NetLED4_3: LED4.3 LED5.1 | length 13.8
  Bottom Layer w0.15: LED5.1 34.342,4.35 38.593,8.6 40.35,8.6 42.25,10.5 42.25,11.5 41.875,11.875 LED4.3
NetLED5_3: LED5.3 LED6.1 | length 10.7
  Bottom Layer w0.15: LED6.1 23.725,3.525 24.5,2.75 31.5,2.75 31.875,3.125 LED5.3
NetLED6_3: LED6.3 LED7.1 | length 10.7
  Bottom Layer w0.15: LED7.1 13.725,3.525 14.5,2.75 21.5,2.75 21.875,3.125 LED6.3
NetLED7_3: LED7.3 LED8.1 | length 13.8
  Bottom Layer w0.15: LED8.1 4.35,10.658 8.7,6.308 8.7,4.6 10.55,2.75 11.45,2.75 11.875,3.175 LED7.3
NetLED8_3: LED8.3 LED9.1 | length 13.7
  Bottom Layer w0.15: LED8.3 3.125,13.125 2.75,13.5 2.75,23.5 3.525,24.275 LED9.1
NetLED9_3: LED9.3 LED10.1 | length 13.7
  Bottom Layer w0.15: LED9.3 3.125,26.125 2.75,26.5 2.75,36.5 3.525,37.275 LED10.1
NetLED10_3: LED10.3 LED11.1 | length 16.2
  Bottom Layer w0.15: LED11.1 3.075,52.275 1.8,51 1.8,40.45 3.125,39.125 LED10.3
NetLED11_3: LED11.3 R12.1 | length 19.4
  Bottom Layer w0.15: LED11.3 5.675,54.125 8.2,51.6 8.2,43.7 7.4,42.9 R12.1
NetR7_2: R7.2 R9.1 U3.14 | length 10.8
  Bottom Layer w0.15: R7.2@8,19.75 8,20.5 9.025,21.525 U3.14 9.025,23.775 9.85,24.6 14.2,24.6 14.4,24.4 R9.1
NetR8_2: R8.2 R10.1 U3.13 | length 7.9
  Bottom Layer w0.15: R8.2@9,19.75 9,20.5 9.675,21.175 U3.13 9.68,22.655 9.68,23.387 10.193,23.9 R10.1@13.429,23.9
NetR13_1: R13.1 U2.2 | length 1.7
  Bottom Layer w0.3: R13.1 32.525,26.85 U2.2@32.55,26.825
SCL: J2.20 R6.2 U3.12 | length 17.4
  Top Layer w0.15: v1(10.293,21.449) 10.767,20.975 v1@21.479,20.975
  Bottom Layer w0.15: R6.2@10,19.75 10,20.8 10.268,21.068 10.268,21.423 v1(10.293,21.449) 10.309,21.465 10.309,22.634 U3.12 ; v1(21.479,20.975) 21.49,20.985 21.49,23.69 J2.20 J2.20@21.5,23.908
SDA: J2.21 R5.2 U3.11 | length 26.5
  Top Layer w0.15: v1(11,20.5) 11.087,20.5 11.288,20.7 14.442,20.7 14.725,20.417 v1(14.725,20.4) ; v1(14.725,30.3) 15.55,30.3 15.85,30.6 20.8,30.6 20.996,30.404 20.996,30.004 v1(21,30)
  Bottom Layer w0.15: U3.11 10.988,22.638 10.988,20.512 v1(11,20.5) 11,19.75 R5.2@11.012,19.738 ; v1(14.725,20.4) 14.725,20.488 14.925,20.688 14.925,30.012 14.725,30.212 v1(14.725,30.3) ; J2.21 v1(21,30)
SPIA_DCX: J1.33 J2.15 | length 15.4
  Top Layer w0.15: v1(22.525,30.55) 22.525,30.545 22.97,30.1 27.1,30.1 v1(27.5,30.5)
  Bottom Layer w0.15: J2.15 22.5,30.525 v1(22.525,30.55) ; v1(27.5,30.5) J1.33 J1.33@27.5,37.3
SPIA_MISO: J1.29 J2.12 | length 30.2
  Top Layer w0.15: v1(16.2,35.1) 17.15,35.1 17.385,34.865 23.115,34.865 23.6,35.35 25.012,35.35 25.212,35.55 v1(25.3,35.55) ; v1(16.225,25.146) 16.921,25.146 17.25,25.475 22.603,25.475 22.803,25.275 23.409,25.275 v1(23.477,25.207)
  Bottom Layer w0.15: v1(16.2,35.1) 16.227,35.073 16.227,25.148 v1(16.225,25.146) ; v1(23.477,25.207) 23.5,25.184 J2.12 ; v1(25.3,35.55) 25.3,35.638 25.5,35.838 J1.29
SPIA_MOSI: J1.30 J2.13 | length 13.3
  Top Layer w0.15: v1(23.054,31.102) 23.07,31.086 23.636,31.086 24.022,30.7 25.712,30.7 25.962,30.95 v1(26,30.95)
  Bottom Layer w0.15: J2.13 23,31.049 v1(23.054,31.102) ; v1(26,30.95) J1.30
SPIA_NCS: J1.34 J2.14 | length 30.9
  Top Layer w0.15: v1(16.75,25.75) v1(23,25.75) ; v1(16.9,34.59) 23.319,34.59 23.803,35.075 27.954,35.075 v1(27.978,35.052)
  Bottom Layer w0.15: v1(16.75,25.75) 16.75,25.79 16.502,26.038 16.502,34.212 16.88,34.59 v1(16.9,34.59) ; J2.14 v1(23,25.75) ; v1(27.978,35.052) 28,35.074 J1.34
SPIA_SCK: J1.32 J2.11 | length 13.4
  Top Layer w0.15: v1(23.475,30.575) 23.583,30.575 23.733,30.425 26.475,30.425 27,30.95 v1(27,31)
  Bottom Layer w0.15: v1(23.475,30.575) 23.5,30.55 J2.11 ; v1(27,31) J1.32 J1.32@27,37.3
SPIB_MISO: J2.17 U1.2 | length 30
  Top Layer w0.15: v1(15.704,31.375) 15.812,31.375 15.98,31.208 21.692,31.208 22.015,30.885 22.015,30.015 v1(22,30) ; v1(15.95,20.4) 16.25,20.7 21,20.7 21.3,20.4 v1(21.9,20.4)
  Bottom Layer w0.15: v1(15.704,31.375) 15.704,20.734 15.95,20.488 v1(15.95,20.4) ; U1.2@21.865,17.775 21.883,17.793 21.883,20.383 v1(21.9,20.4) ; J2.17@22,27.327 v1(22,30)
SPIB_MOSI: J2.18 U1.5 | length 16.3
  Top Layer w0.15: v1(22,21.5) v1(25.25,21.5)
  Bottom Layer w0.15: v1(22,21.5) J2.18 ; U1.5@24.405,11 24.405,13.655 25.25,14.5 v1(25.25,21.5)
SPIB_NCS: J2.19 R4.2 U1.1 | length 39.5
  Top Layer w0.15: v1(15.2,30.9) 21.2,30.9 v1(21.5,30.6) ; v1(15.5,12.1) v1(17.75,12.1) ; v1(15.5,19.8) 16.1,19.8 16.7,20.4 20.4,20.4 20.596,20.204 20.596,19.804 v1(20.6,19.8)
  Bottom Layer w0.15: v1(15.2,30.9) 15.2,20.1 v1(15.5,19.8) ; v1(15.5,12.1) v1@15.5,19.742 ; v1(17.75,12.1) 17.75,11.275 R4.2 ; U1.1@20.595,17.775 20.6,17.78 v1(20.6,19.8) ; J2.19@21.5,27.312 v1(21.5,30.6)
SPIB_SCK: J2.16 U1.6 | length 13.5
  Bottom Layer w0.15: J2.16 22.5,23 23.7,21.8 23.7,14.3 23.135,13.735 U1.6
XL: J1.44 U3.4 | length 32.4
  Top Layer w0.15: v1(9.7,32.3) 9.7,32.4 10.15,32.85 32.779,32.85 32.979,32.65 v1(33.067,32.65)
  Bottom Layer w0.15: U3.4 9.675,32.275 v1(9.7,32.3) ; J1.44@33.012,37.3 33.012,32.705 v1(33.067,32.65)
XR: J1.42 U3.2 | length 32
  Top Layer w0.15: v1(8.4,32.2) 8.429,32.229 8.429,32.579 9.25,33.4 31.717,33.4 31.942,33.625 v1(32.05,33.625)
  Bottom Layer w0.15: U3.2 8.375,32.175 v1(8.4,32.2) ; J1.42 32.025,37.225 32.025,33.65 v1(32.05,33.625)
YD: J1.43 U3.5 | length 31.4
  Top Layer w0.15: v1(10.312,31.888) 10.362,31.938 10.362,32.362 10.575,32.575 32.099,32.575 32.318,32.357 32.426,32.357 v1(32.502,32.28)
  Bottom Layer w0.15: v1(10.312,31.888) 10.312,28.363 U3.5 ; J1.43 32.525,37.225 32.525,32.303 v1(32.502,32.28)
YU: J1.45 U3.3 | length 33
  Top Layer w0.15: v1(9,31.8) 9,32.4 9.725,33.125 33.224,33.125 33.234,33.135 33.435,33.135 v1(33.512,33.212)
  Bottom Layer w0.15: v1(9,31.8) 9.025,31.775 U3.3 ; v1(33.512,33.212) 33.512,33.212 J1.45@33.512,37.3
pads on no net: J1.1 U2.5 U3.7 U3.8 U3.9 U3.15 U3.16

## Polygon pours and split planes (outlines as drawn)
GND on Top Layer "Top_GND" (solid, remove dead copper, pour order 4): 44.611,63.654 -0.389,63.654 -0.389,0.154 44.611,0.154
5V on Top Layer "NONET_L-01_P-001" (solid, remove dead copper, pour order 1): 45,55.5 40.5,55.5 ccw(c40.5,54.5) 39.5,54.5 39.5,7.5 cw(c37.5,7.5) 37.5,5.5 7.5,5.5 cw(c7.5,7.5) 5.5,7.5 5.5,54.5 ccw(c4.5,54.5) 4.5,55.5 0,55.5 0,0 45,0
GND on Bottom Layer "Bottom_GND" (solid, remove dead copper, pour order 2): 45,63.5 0,63.5 0,0 45,0

## Silkscreen, mask and mechanical layers (free items; w line width, h text height)
Bottom Overlay:
  drawing of 4 lines, arcs and shapes, not listed
  text "School of Engineering" at 35.4,7.917 h2.2
  text "Institute of Embedded Systems" at 35.4,6.082 h2
  text "V.ProjectPcbRevision" at 13.15,0.823 h2.2
  text ".ProjectProjectName" at 37,0.823 h2.2
Board Shape:
  lines w0.1: 0,61.5 cw(c2,61.5) 2,63.5 43,63.5 cw(c43,61.5) 45,61.5 45,2 cw(c43,2) 43,0 ; 0,61.5 0,2 ccw(c2,2) 2,0 43,0 ; 43,0 ccw(c43,0) 43,0 ; 4.5,57.5 ccw(c5.5,57.5) 5.5,56.5 39.5,56.5 ccw(c39.5,57.5) 40.5,57.5 40.5,60.5 ccw(c39.5,60.5) 39.5,61.5 5.5,61.5 ccw(c5.5,60.5) 4.5,60.5 4.5,57.5
Misc:
  lines w0.1: 9.5,25.5 10.5,25.5 ; 10,25 10,26 ; 14.525,1.5 22.5,1.5 30.475,1.5 ; 21.5,40.5 23.5,40.5 ; 22,25.5 23,25.5 ; 22.5,0 22.5,3 ; 22.5,25 22.5,26 ; 22.5,39.5 22.5,41.5 ; 37,0 37,11 ; 37,11 27,11 27,21 37,21 37,11
  lines w0.15: 2,5 8,5 ; 2,46 8,46 ; 5,2 5,8 ; 5,43 5,49 ; 37,5 43,5 ; 37,46 43,46 ; 40,2 40,8 ; 40,43 40,49
Fab Notes:
  lines w0.025: 86.818,-27.523 89.101,-25.24 92.149,-22.192 95.197,-19.144 98.245,-16.096 99.769,-14.572 ; 86.818,-25.999 87.577,-25.24 90.625,-22.192 93.673,-19.144 96.721,-16.096 99.769,-13.048 ; 86.818,-24.475 89.101,-22.192 92.149,-19.144 95.197,-16.096 98.245,-13.048 99.769,-11.524 ; 86.818,-22.951 87.577,-22.192 90.625,-19.144 93.673,-16.096 96.721,-13.048 99.769,-10 ; 86.818,-21.427 89.101,-19.144 92.149,-16.096 95.197,-13.048 98.245,-10 99.769,-8.476 ; 86.818,-19.903 87.577,-19.144 90.625,-16.096 93.673,-13.048 96.721,-10 99.769,-6.952 ; 86.818,-18.379 89.101,-16.096 92.149,-13.048 95.197,-10 98.245,-6.952 ; 86.818,-16.855 87.577,-16.096 90.625,-13.048 93.673,-10 96.721,-6.952 ; 86.818,-15.331 89.101,-13.048 92.149,-10 95.197,-6.952 ; 86.818,-13.807 87.577,-13.048 90.625,-10 93.673,-6.952 ; 86.818,-12.283 89.101,-10 92.149,-6.952 ; 86.818,-10.759 87.577,-10 90.625,-6.952 ; 86.818,-9.235 89.101,-6.952 ; 86.818,-7.711 87.577,-6.952 ; 87.577,-28.288 90.625,-25.24 93.673,-22.192 96.721,-19.144 99.769,-16.096 ; 89.101,-28.288 92.149,-25.24 95.197,-22.192 98.245,-19.144 99.769,-17.62 ; 90.625,-28.288 93.673,-25.24 96.721,-22.192 99.769,-19.144 ; 92.149,-28.288 95.197,-25.24 98.245,-22.192 99.769,-20.668 ; 93.673,-28.288 96.721,-25.24 99.769,-22.192 ; 95.197,-28.288 98.245,-25.24 99.769,-23.716 ; 96.721,-28.288 99.769,-25.24 ; 98.245,-28.288 99.769,-26.764
  lines w0.381: -0.027,-25.24 10.384,-25.24 34,-25.24 55.838,-25.24 72.344,-25.24 86.818,-25.24 99.769,-25.24 ; -0.027,-22.192 10.384,-22.192 34,-22.192 55.838,-22.192 72.344,-22.192 86.818,-22.192 99.769,-22.192 ; -0.027,-19.144 10.384,-19.144 34,-19.144 55.838,-19.144 72.344,-19.144 86.818,-19.144 99.769,-19.144 ; -0.027,-16.096 10.384,-16.096 34,-16.096 55.838,-16.096 72.344,-16.096 86.818,-16.096 99.769,-16.096 ; -0.027,-13.048 10.384,-13.048 34,-13.048 55.838,-13.048 72.344,-13.048 86.818,-13.048 99.769,-13.048 ; -0.027,-10 10.384,-10 34,-10 55.838,-10 72.344,-10 86.818,-10 99.769,-10 ; -0.027,-6.952 99.769,-6.952 ; 10.384,-3.904 10.384,-28.288 ; 34,-3.904 34,-28.288 ; 55.838,-3.904 55.838,-28.288 ; 72.344,-3.904 72.344,-28.288 ; 86.818,-3.904 86.818,-28.288 ; 10.384,-28.288 34,-28.288 ; 10.384,-28.288 -0.027,-28.288 -0.027,-3.904 99.769,-3.904 99.769,-28.288 86.818,-28.288 ; 34,-28.288 55.838,-28.288 ; 55.838,-28.288 72.344,-28.288 ; 72.344,-28.288 86.818,-28.288
  text "Layer" at 1.751,-6.19 h1.52
  text "Name" at 12.162,-6.19 h1.52
  text "Material" at 35.778,-6.19 h1.52
  text "Thickness" at 57.616,-6.19 h1.52
  text "Constant" at 74.122,-6.19 h1.52
  text "Rigid" at 88.596,-6.19 h1.52
  text "Top Overlay" at 12.162,-9.238 h1.52
  text "Top Solder" at 12.162,-12.286 h1.52
  text "Solder Resist" at 35.778,-12.286 h1.52
  text "0.010mm" at 57.616,-12.286 h1.52
  text "3.3" at 74.122,-12.286 h1.52
  text "1" at 1.751,-15.334 h1.52
  text "Top Layer" at 12.162,-15.334 h1.52
  text "0.035mm" at 57.616,-15.334 h1.52
  text "Dielectric 3" at 12.162,-18.382 h1.52
  text "IS400" at 35.778,-18.382 h1.52
  text "1.500mm" at 57.616,-18.382 h1.52
  text "4.52" at 74.122,-18.382 h1.52
  text "2" at 1.751,-21.43 h1.52
  text "Bottom Layer" at 12.162,-21.43 h1.52
  text "0.035mm" at 57.616,-21.43 h1.52
  text "Bottom Solder" at 12.162,-24.478 h1.52
  text "Solder Resist" at 35.778,-24.478 h1.52
  text "0.010mm" at 57.616,-24.478 h1.52
  text "3.3" at 74.122,-24.478 h1.52
  text "Bottom Overlay" at 12.162,-27.526 h1.52
  text "Total board thickness:" at 1.751,-30.574 h1.52
  text "1.590mm" at 57.616,-30.574 h1.52

## Text inside footprints (layer, text, board x,y; h text height)
DS1: Bottom Misc "SEA8058-45" at 36.26,38.92 h0.8 r180; Top Misc "BL OUTLINE" at 43.55,2.8 h0.5 r180; Top Misc "LCD AA" at 40.5,5.85 h0.5 r180; Top Misc "YD" at 22.15,52.95 h1 r180; Top Misc "YU" at 22.15,7.05 h1 r180; Top Misc "XR" at 6.866,30.8 h1 r180; Top Misc "XL" at 39.8,30.8 h1 r180
LED1: Bottom Misc "Recommended pads" at 41.747,55.355 h0.1 r90
LED2: Bottom Misc "Recommended pads" at 41.247,40.355 h0.1 r90
LED3: Bottom Misc "Recommended pads" at 41.247,27.355 h0.1 r90
LED4: Bottom Misc "Recommended pads" at 41.247,14.355 h0.1 r90
LED5: Bottom Misc "Recommended pads" at 34.355,3.753 h0.1
LED6: Bottom Misc "Recommended pads" at 24.355,3.753 h0.1
LED7: Bottom Misc "Recommended pads" at 14.355,3.753 h0.1
LED8: Bottom Misc "Recommended pads" at 3.753,10.645 h0.1 r270
LED9: Bottom Misc "Recommended pads" at 3.753,23.645 h0.1 r270
LED10: Bottom Misc "Recommended pads" at 3.753,36.645 h0.1 r270
LED11: Bottom Misc "Recommended pads" at 3.253,51.645 h0.1 r270